# EAGLE board BackscatterPlantSensor_v6_2 (EAGLE 6.4)
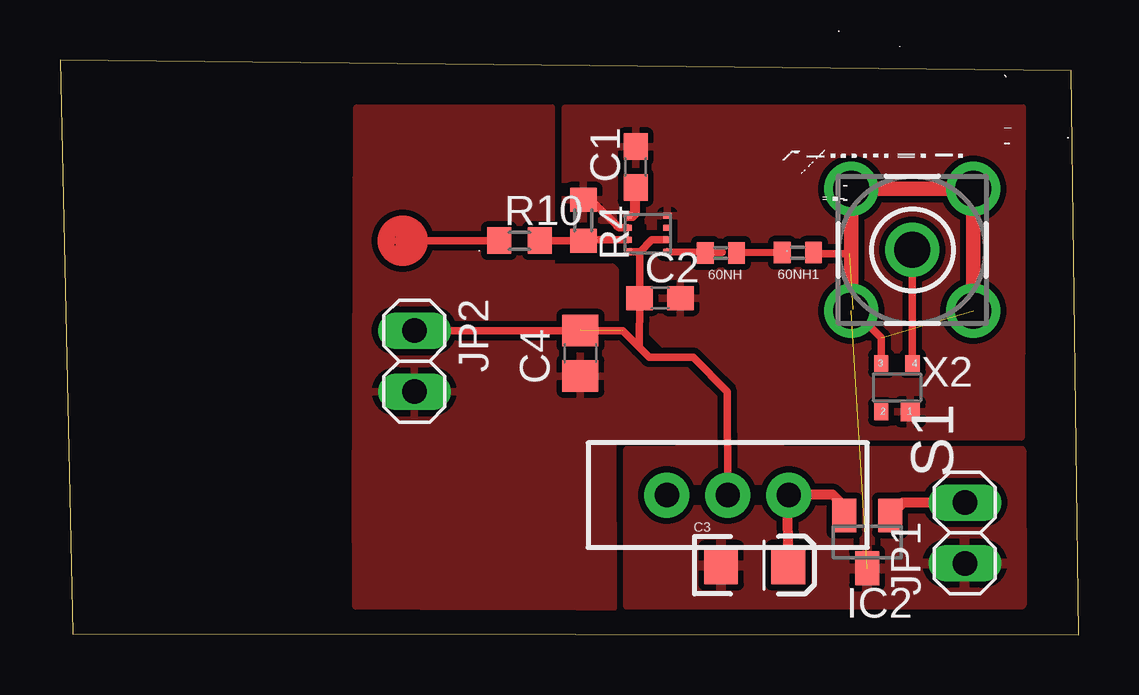
[diagram p0: board, top side]

Size 42.44 x 23.95 mm. Coordinates in mm from the lower left corner, seen from the top.
Outline: 0.53,0.05 42.44,0 42.13,23.5 0,23.95 0.53,0.05
Copper layers (1*16): Top 0.035mm / dielectric 1.5mm / Bottom 0.035mm
Design rules "default *": minimum track width 10mil, minimum drill 24mil, track to track 10mil, track to pad 10mil, pad to pad 10mil, via to via 10mil, smd to smd 10mil, copper to edge 40mil, drill to drill 8mil, minimum pad ring 10mil, minimum via ring 8mil, stop-mask expansion 4mil, vias tented up to drill 0mil, thermal gap 10mil

## Footprints (pad centres in the part's own frame; a part is rotated, then mirrored left to right if it is on the bottom)
C0402 = smd 0.7 x 0.9: 1 -0.65,0; 2 0.65,0
C0603 = smd 1.1 x 1: 1 -0.85,0; 2 0.85,0
EIA3216 = smd 1.4 x 1.6: A 1.4,0; C -1.4,0
C0805 = smd 1.3 x 1.5: 1 -0.95,0; 2 0.95,0
SOT23 = smd 1 x 1.4: 1 -0.95,-1.1; 2 0.95,-1.1; 3 0,1.1
1X02 = drill 1.016 long: 1 -1.27,0; 2 1.27,0
R0603 = smd 1 x 1.1: 1 -0.85,0; 2 0.85,0
SWITCH-SPDT = drill 1.016 pad 1.88: 1 0,2.54; 2 0,0; 3 0,-2.54
TDFN22-8 = smd 0.35 x 0.25: 1 -1.78,-0.7; 2 -1.78,-1.2; 3 -1.78,-1.7; 4 -1.78,-2.2; 5 -0.13,-2.2; 6 -0.13,-1.7; 7 -0.13,-1.2; 8 -0.13,-0.7
SOT343R = smd 0.8 x 0.8: 1 0.55,-1.07 | smd 0.6 x 0.7: 2 -0.66,-1.07; 3 -0.66,0.94; 4 0.65,0.94
LTI-SASF54GT = drill 1.5 pad 2.2: 1 0,0; 2 -2.54,2.54; 3 2.54,2.54; 4 2.54,-2.54; 5 -2.54,-2.54

## Placement (x,y rotation side)
60NH  [C0402]  27.53,15.91 180 top
60NH1  [C0402]  30.74,15.92 180 top
C1  [C0603]  23.99,19.5 90 top
C2  [C0603]  25,14.04 0 top
C3  [EIA3216]  28.94,2.91 0 top
C4  [C0805]  21.69,11.73 90 top
IC2  MAX6520  [SOT23]  33.63,3.88 180 top
JP1  [1X02]  37.7,4.24 90 top
JP2  [1X02]  14.77,11.41 270 top
R4  [R0603]  21.81,17.27 270 top
R10  [R0603]  19.14,16.43 0 top
S1  [SWITCH-SPDT]  27.83,5.83 270 top
U$1  [TDFN22-8]  23.53,15.26 180 top
U$4  BF1118SOT343R_NXP  [SOT343R]  34.88,10.36 0 top
X2  LTI-SASF54GT  [LTI-SASF54GT]  35.51,16.04 180 top

## Library data of the parts
60NH 60NH1 = SparkFun
C1 C2 = eagle-ltspice; SPICEMODEL: NONE; SPICEPREFIX: C
C3 = SparkFun-Capacitors
C4 = sym
IC2 = maxim; MF: MAXIM; MPN: MAX6520EUR-T; OC_FARNELL: unknown; OC_NEWARK: 02J4586
JP1 JP2 = pinhead
R4 R10 = rcl
S1 = semipassiveTag_library
U$1 = ts3002TDFN22_8pin
U$4 = rf_transistors
X2 = con-coax; OC_FARNELL: unknown; OC_NEWARK: unknown

## Nets
AGND: C4.1 JP2.2
DGND: C1.2 C2.2 R4.1 U$1.4 U$1.6 U$4.1
DRAIN: U$4.4 X2.1
FOUT: 60NH.2 U$1.1
FOUT2: 60NH1.1 U$4.3 X2.2
GND: C3.C IC2.3 JP1.1 X2.3 X2.4 X2.5
N$1: C1.1 U$1.5
N$2: R4.2 R10.2 U$1.7
N$3: 60NH1.2 60NH.1
N$4: IC2.1 JP1.2
N$7: C3.A IC2.2 S1.1
VCOND: R10.1
VDD: C2.1 C4.2 JP2.1 S1.2 U$1.2 U$1.8

## Tracks (layer width: path | path; a pad name or v marks a point on that pad's centre or on a via)
AGND
  pour Top: 23.03,8.27 27.75,8.27 27.72,9.4 26.05,11.05 24.66,11.06 23.14,12.58 23.14,15.2 23.02,15.33 20.47,15.33 20.47,21.96 12.35,21.95 12.3,4.87 12.32,2.77 12.32,1.22 23.05,1.13
DGND
  Top 0.305: R4.1 22.24,18.01 23.29,16.96 U$1.6 23.3,16.96 23.2,17.04
  pour Top: 21.05,21.95 21.05,17.29 24.59,17.29 24.59,12.67 25.16,12.12 26.61,12.12 28.3,10.45 28.38,8.24 40.05,8.24 40.08,21.96
DRAIN
  Top 0.305: U$4.4 35.51,11.79 X2.1
FOUT
  Top 0.305: 60NH.2 27.6,15.95 U$1.1
FOUT2  (2 unrouted)
  Top 0.305: 60NH1.1 31.45,15.88 32.89,15.88 | X2.2 38.06,13.56 | 38.06,18.63 38.05,18.57 | U$4.3 34.22,12.38 33.02,13.58
  Top 0.61: 38.05,18.57 X2.2
GND  (1 unrouted)
  Top 0.61: X2.3 X2.4 X2.5
  pour Top: 23.67,7.67 40.05,7.67 40.06,1.27 23.67,1.23
N$1
  Top 0.406: U$1.5 23.86,17.46 23.97,17.57 23.97,18.63 C1.1
N$2
  Top 0.305: R10.2 20.11,16.42 R4.2 22.17,16.46 U$1.7
N$3
  Top 0.305: 60NH1.2 28.21,15.93 60NH.1
N$4
  Top 0.406: JP1.2 35.12,5.52 IC2.1
N$7
  Top 0.406: C3.A 30.31,5.8 S1.1 30.19,5.84 32.19,5.84 32.69,5.35 IC2.2
N$14
  pour Top: 27.72,9.02 27.75,7.13 25.8,7.09 25.8,9.06
N$21
  pour Top: 28.38,7.27 28.36,9.59 30.02,9.59 30,7.27 29.09,7.27 29.09,7.3
VCOND
  Top 0.305: 14.03,16.43 R10.1
VDD  (1 unrouted)
  Top 0.305: 24.15,15.94 C2.1 24.13,11.99 | U$1.8 24.15,15.97 24.15,15.94 | 24.15,15.94 24.66,16.46 U$1.2 | S1.2 27.8,10.13 26.39,11.56 24.55,11.56 24.13,11.99 | JP2.1 23.44,12.67 24.13,11.99
(copper drawn outside any net)
  shapes: Top area x2, Top circle x2